# Altium PCB layout.PcbDoc (part 1 of 2)
Units mm, origin at the board's own origin, x right, y up, seen from the top; angles counter-clockwise.
Board outline 69.9 x 70 mm, 4 copper layers (Top Layer, InternalPlane1, InternalPlane2, Bottom Layer), stack 1.963 mm thick; 138 components, 103 nets, 461 pads, 387 vias.
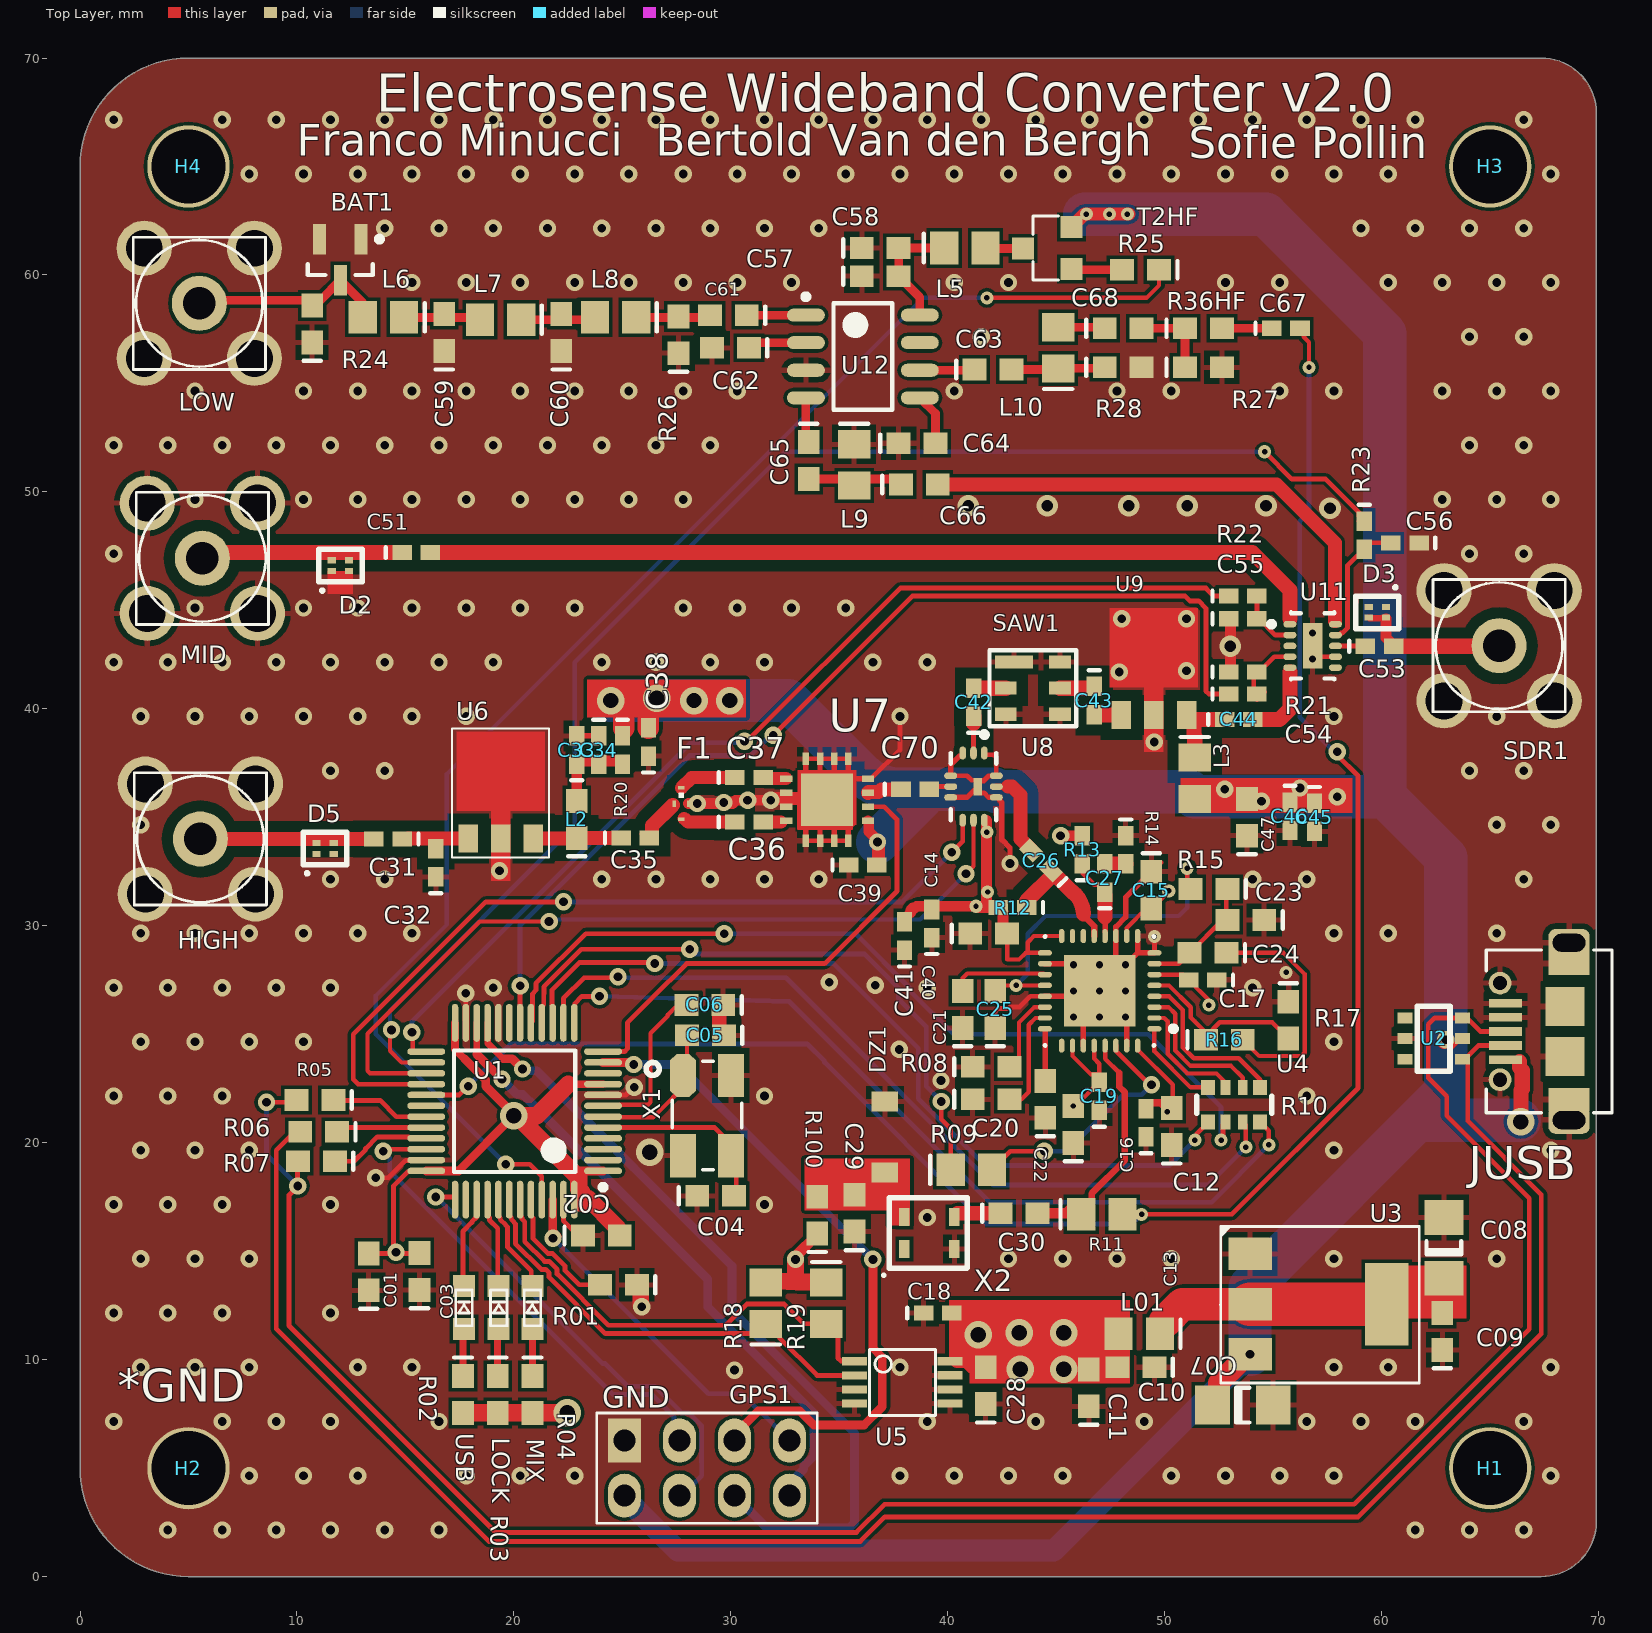
[diagram p0: Top Layer view]
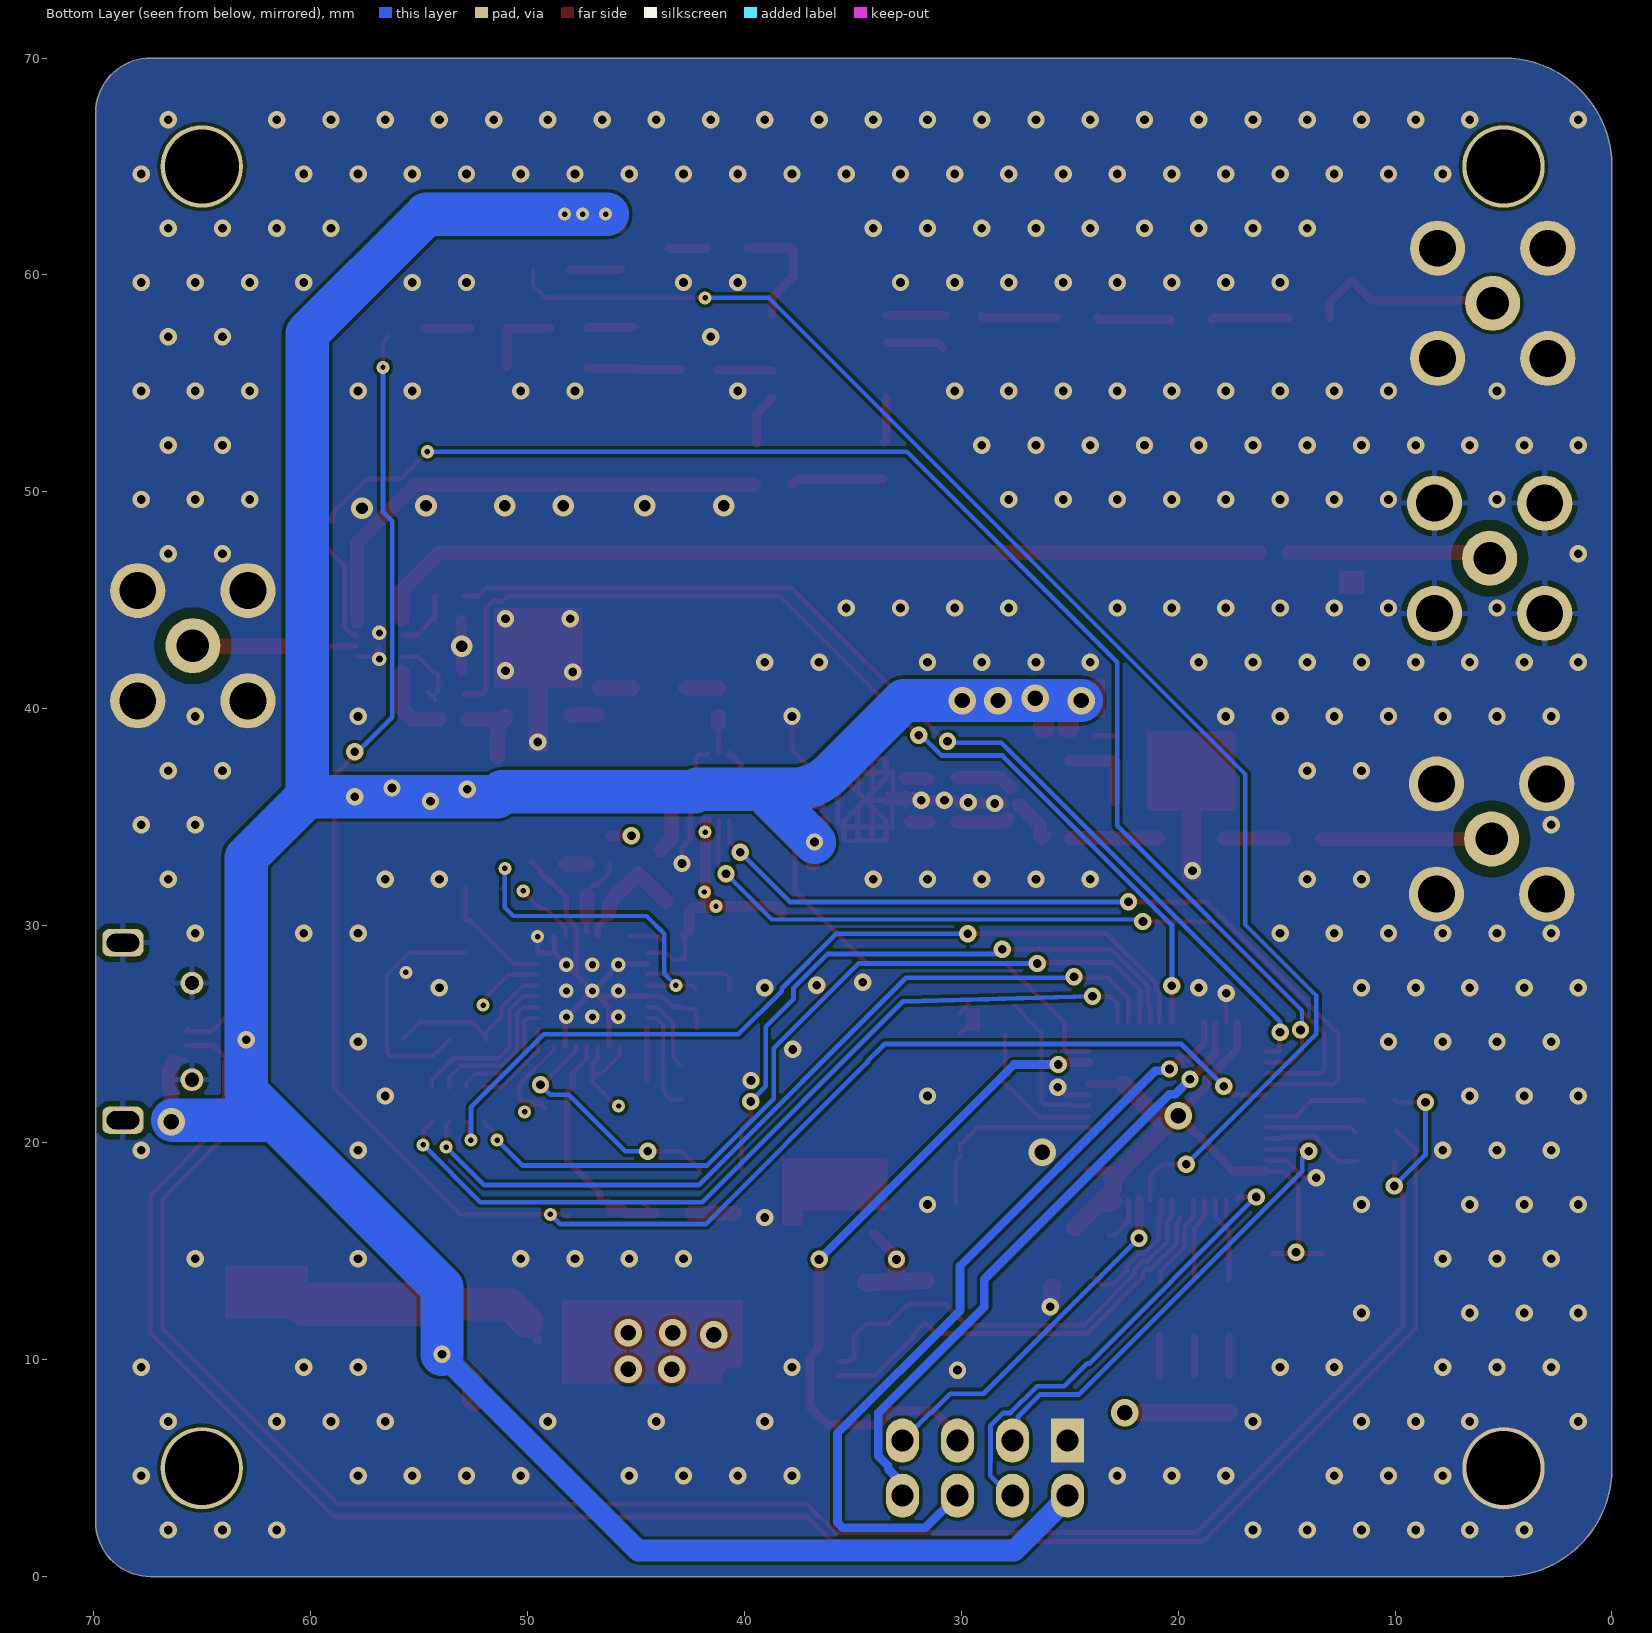
[diagram p1: Bottom Layer view, seen from below]
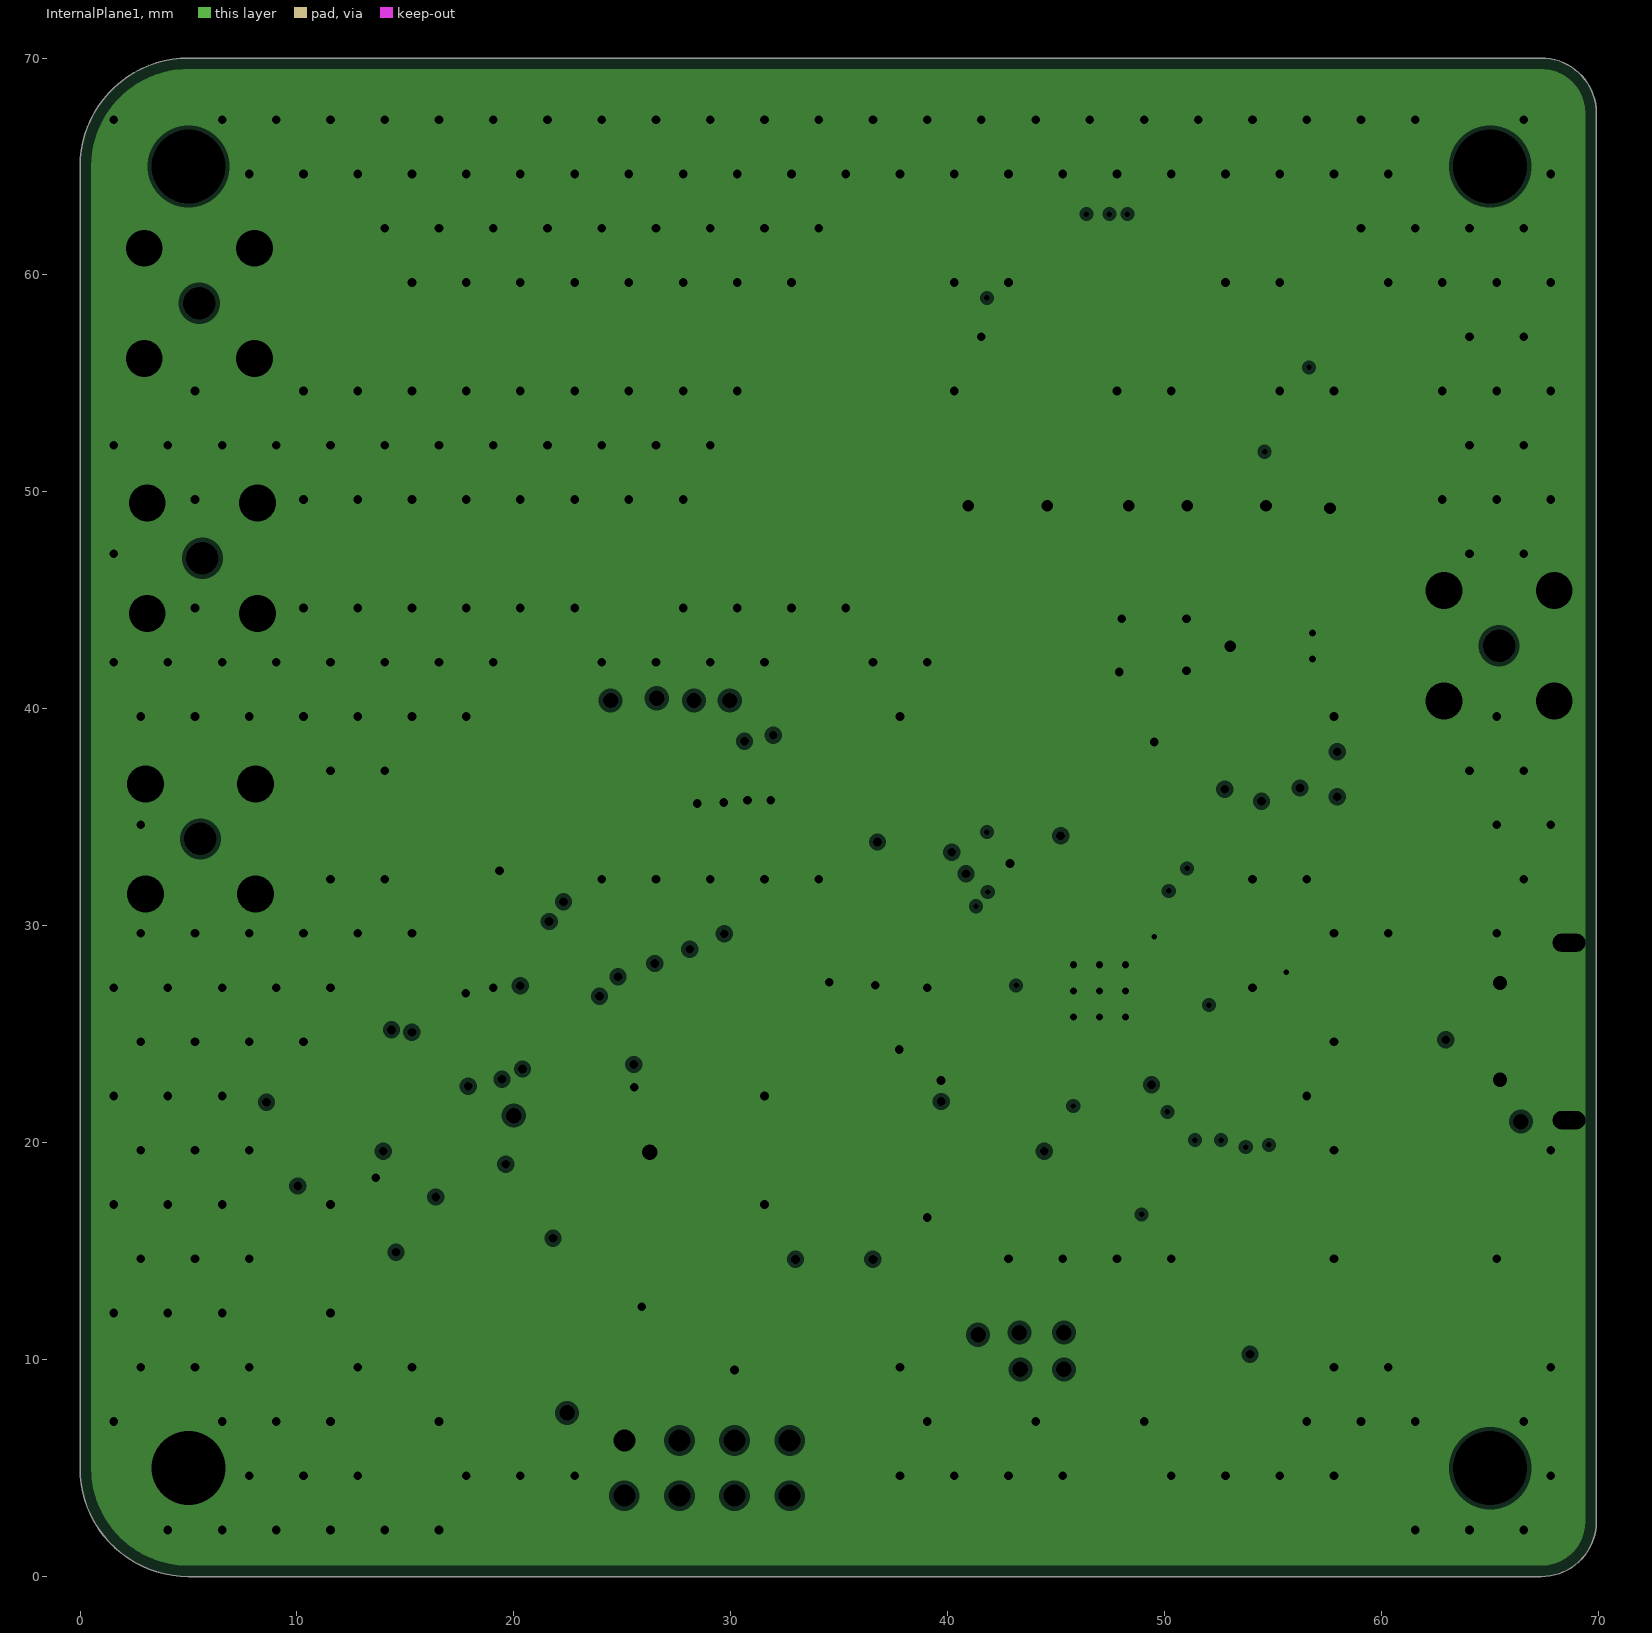
[diagram p2: InternalPlane1, clearances drawn from the general rule]
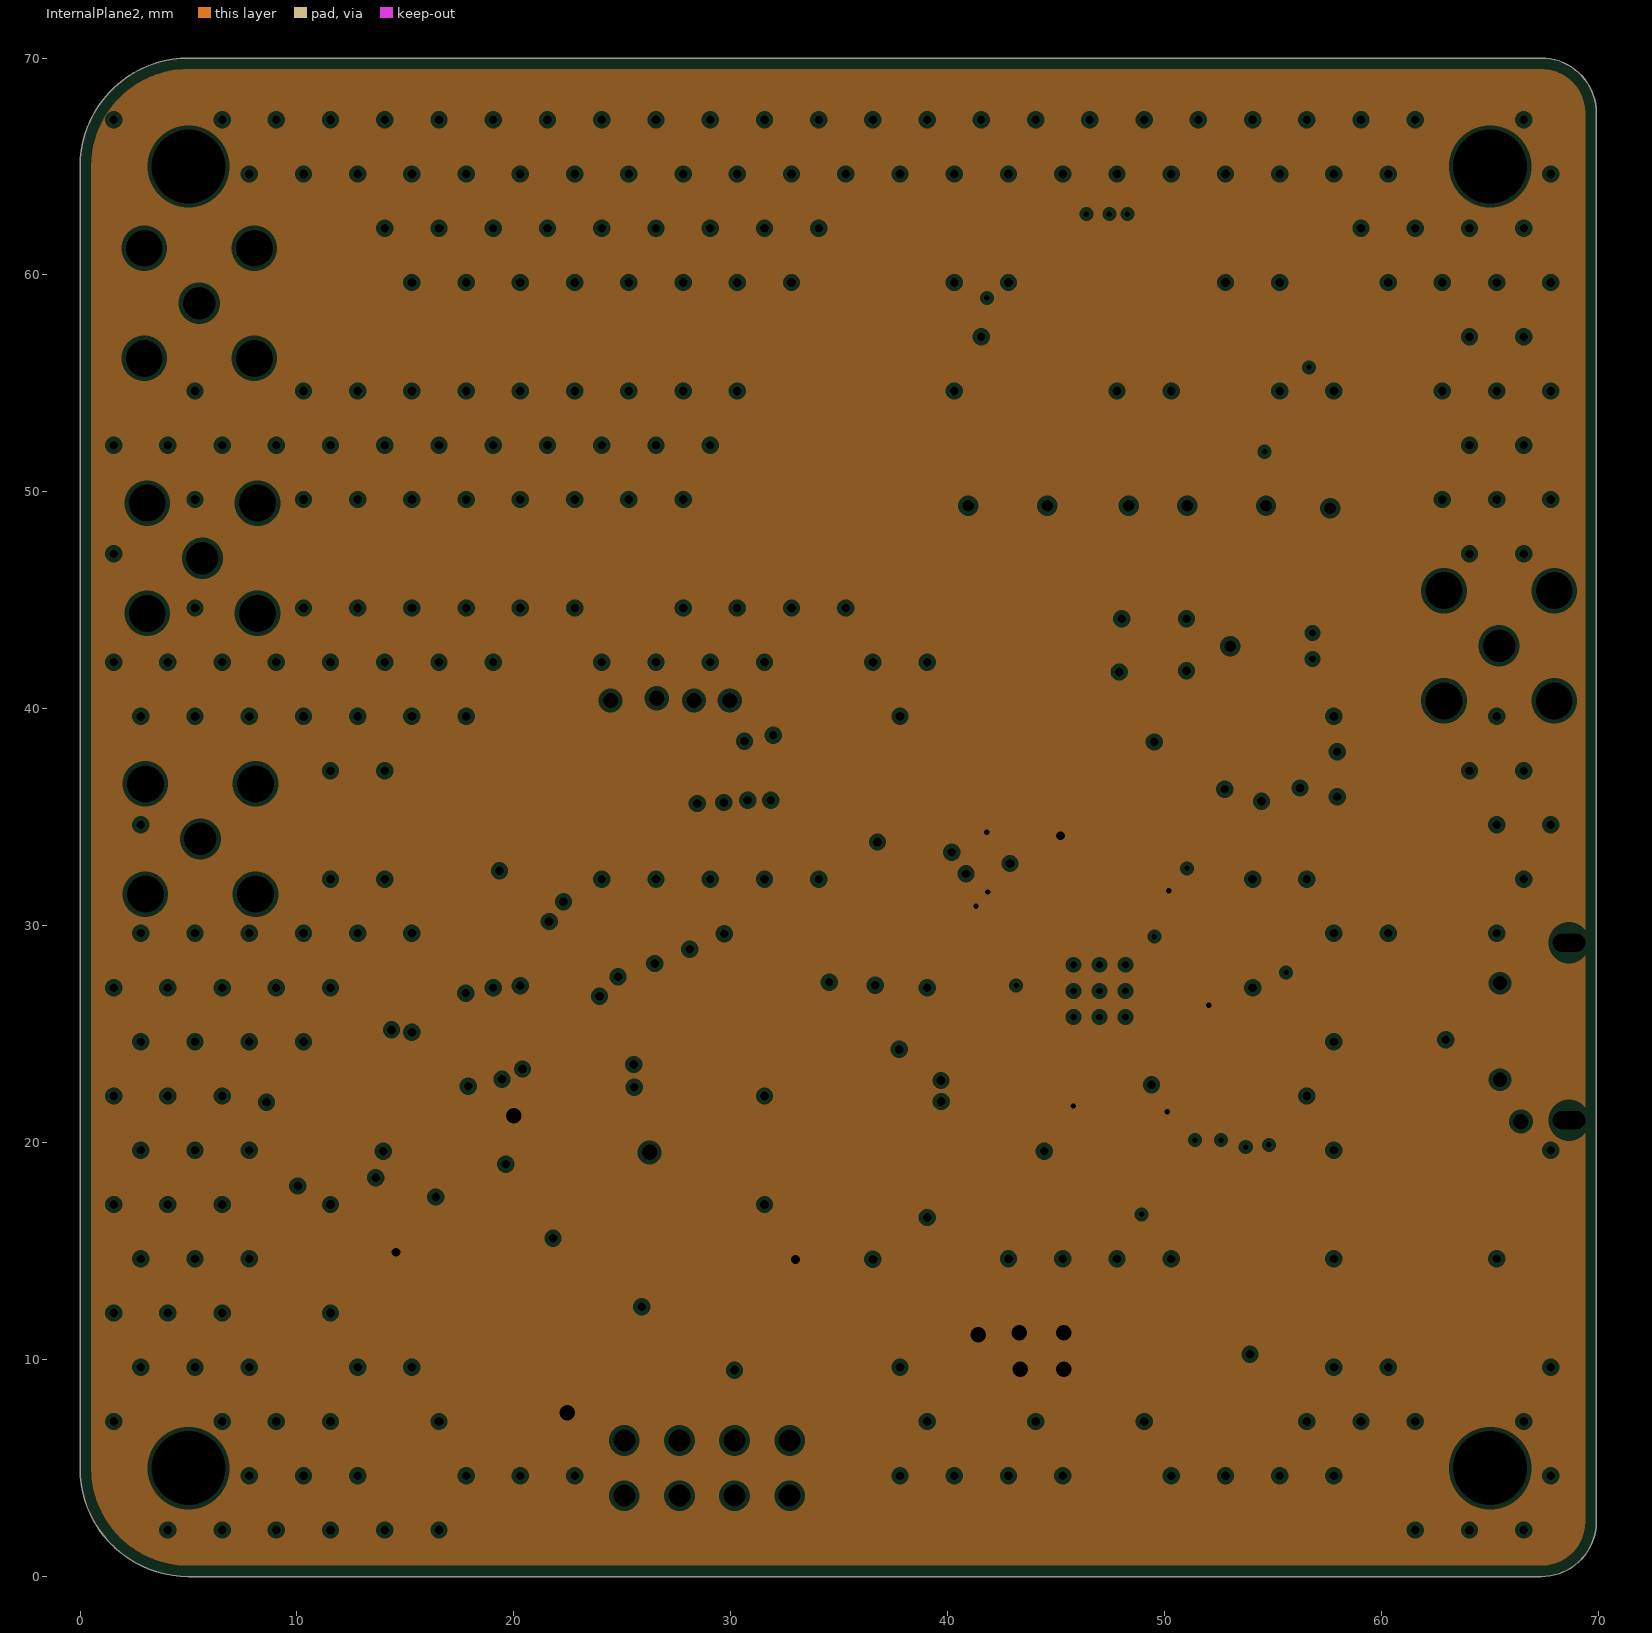
[diagram p3: InternalPlane2, clearances drawn from the general rule]

## Layer stack, top to bottom
Top Solder: solder mask 0.0102, Solder Resist, Dk 3.5
Top Layer: signal copper 0.0356
Dielectric1: core 0.36, FR-4, Dk 4.8
InternalPlane1: plane copper 0.036, net GND
Dielectric5: prepreg 1.1, FR-4, Dk 4.8
InternalPlane2: plane copper 0.036, net 3V3
Dielectric6: core 0.36, FR-4, Dk 4.8
Bottom Layer: signal copper 0.0356
Bottom Solder: solder mask 0.0102, Solder Resist, Dk 3.5

## Board outline
65.15,70 67.36,70 cw(c67.36,67.46) 69.9,67.46 69.9,2.54 cw(c67.36,2.54) 67.36,0 5,0 cw(c5,5) 0,5 0,65 cw(c5,65) 5,70

## Design rules (kind name [scope] priority, off if disabled: settings)
Clearance Clearance_1 [(InPolygon) vs InNetClass('RF')] p1: gap=0.5 ignorepadtopadclearanceinfootprint=FALSE except(0: Arc-Hole Track-Hole SMDPad-Hole THPad-Hole Via-Hole Fill-Hole Poly-Hole Region-Hole Text-Hole)
Clearance [All] p2: gap=0.15 ignorepadtopadclearanceinfootprint=FALSE except(0: Arc-Hole Track-Hole SMDPad-Hole THPad-Hole Via-Hole Fill-Hole Poly-Hole Region-Hole Text-Hole)
DiffPairsRouting [(InDifferentialPairClass('All Differential Pairs'))] p1: maxlimit=0.254 minlimit=0.254 mostfreqgap=0.254 substack1={63094944-3E1E-4474-AD37-56A4AEF7B2FF} toplayer_{63094944-3e1e-4474-ad37-56a4aef7b2ff}_minwidth=0.381 toplayer_{63094944-3e1e-4474-ad37-56a4aef7b2ff}_maxwidth=0.381 toplayer_{63094944-3e1e-4474-ad37-56a4aef7b2ff}_prefwidth=0.381 bottomlayer_{63094944-3e1e-4474-ad37-56a4aef7b2ff}_minwidth=0.381 bottomlayer_{63094944-3e1e-4474-ad37-56a4aef7b2ff}_maxwidth=0.381 bottomlayer_{63094944-3e1e-4474-ad37-56a4aef7b2ff}_prefwidth=0.381 toplayer_minwidth=0.381 toplayer_maxwidth=0.381 toplayer_prefwidth=0.381 bottomlayer_minwidth=0.381 bottomlayer_maxwidth=0.381 bottomlayer_prefwidth=0.381 maxuncoupledlength=12.7
HoleSize [All] p1: absolutevalues=TRUE maxlimit=3.5 minlimit=0.025 maxpercent=80.000 minpercent=20.000
MinimumAnnularRing [All] p1: minimumring=0.125
MinimumSolderMaskSliver [All] p1: minsoldermaskwidth=0
PlaneClearance [All] p1: clearance=0.2
PlaneConnect [All] p1: planeconnectstyle=Direct reliefexpansion=0.508 reliefentries=4 reliefconductorwidth=0.254 reliefairgap=0.254
PolygonConnect PolygonConnect_1 [(InPadClass('Direct') or isVia) vs InNet('GND')] p1: connectstyle=Direct reliefconductorwidth=0.254 reliefentries=4 polygonreliefangle="90 Angle" airgapwidth=0.254
PolygonConnect [All] p2: connectstyle=Relief reliefconductorwidth=0.254 reliefentries=4 polygonreliefangle="90 Angle" airgapwidth=0.254
RoutingVias [All] p1: holewidth=0.4 width=0.8 viastyle="Through Hole" minholewidth=0.25 minwidth=0.6 maxholewidth=2 maxwidth=2.5
SilkToSilkClearance [All] p1 off: silktosilkclearance=0.254
SilkToSolderMaskClearance SilkscreenOverComponentPads [IsPad] p1 off: minsilkscreentomaskgap=0.254 clearancetoexposedcopper=TRUE
SolderMaskExpansion [All] p1: expansion=0 istentingtop=FALSE
Width [All] p1: maxlimit=2.54 minlimit=0.15 preferedwidth=0.22 substack1={63094944-3E1E-4474-AD37-56A4AEF7B2FF}
23 further rules are at their usual default settings.

## Classes and differential pairs
component class Toplevel: H1 H2 H3 H4
net class RF: IMG_F_HIGH IMG_F_LOW LO+ LO- Mixer_switch_in NetC31_1 NetC31_2 NetC35_1 NetC35_2 NetC42_1 NetC42_2 NetC43_1 NetC43_2 NetC44_1 NetC51_1 NetC51_2 NetC53_1 NetC53_2 NetC70_1 NetC70_2 RFOUTA+ RFOUTA-
component class U_CPU: C01 C02 C03 C04 C05 C06 C07 C08 C09 C10 C11 C11CPU GPS1 JUSB L01 LOCK MIX R01 R02 R02CPU R03 R03CPU R04 R04CPU R05 R06 R07 R07CPU R08CPU U1 U2 U3 USB X1
component class U_LO: C7 C12 C13 C14 C15 C16 C17 C18 C018LO C19 C019LO C20 C020LO C21 C22 C23 C24 C25 C26 C27 C28 C29 C30 DZ1 R1 R2 R3 R4 R5 R6 R08 R9 R09 R10 R11 R011LO R12 R13 R14 R15 R16 R17 R18 R19 R039LO R040LO R041LO R100 U4 U5 X2
component class U_MixerHF: BAT1 C57 C58 C59 C60 C61 C62 C63 C64 C65 C66 C67 C68 C73HF C75HF C76HF C78HF C79HF C80HF C81HF C82HF C83HF C84HF L5 L6 L6HF L7 L7HF L8 L8HF L9 L9HF L10 L10HF LOW R24 R25 R26 R27 R28 R36HF T2HF U12
component class U_Mixer: C31 C32 C33 C34 C35 C36 C37 C38 C39 C40 C41 C42 C43 C44 C45 C46 C47 C51 C53 C54 C55 C56 C70 C71 C72 C102 C103 D2 D3 D5 F1 HIGH L2 L3 MID R20 R21 R22 R23 R30 R32 SAW1 SDR1 U6 U7 U8 U9 U11
pad class Direct: BAT1-1 BAT1-2 BAT1-3 C51-1 C51-2 C56-1 C56-2 C59-1 C59-2 C60-1 C60-2 C67-1 C67-2 C70-1 C70-2 C71-1 C71-2 C72-1 C72-2 D2-1 D2-2 D2-3 D2-4 D5-1 D5-2 D5-3 D5-4 GPS1-1 GPS1-2 GPS1-3 GPS1-4 GPS1-5 GPS1-6 GPS1-7 GPS1-8 H1-0 H2-0 H3-0 H4-0 HIGH-1 HIGH-2 HIGH-3 HIGH-4 HIGH-5 LOCK-1 LOCK-2 LOW-1 LOW-2 LOW-3 LOW-4 LOW-5 MIX-1 MIX-2 R28-1 R28-2 R30-1 R30-2 R32-1 R32-2 SDR1-1 SDR1-2 SDR1-3 SDR1-4 SDR1-5 U1-1 U1-2 U1-3 U1-4 U1-5 U1-6 U1-7 U1-8 U1-9 U1-10 U1-11 U1-12 U1-13 U1-14 U1-15 U1-16 U1-17 U1-18 U1-19 U1-20 U1-21 U1-22 U1-23 U1-24 U1-25 U1-26 U1-27 U1-28 U1-29 U1-30 U1-31 U1-32 U1-33 U11-1 U11-2 U11-3 U20-1 U20-2 U20-3 USB-1 USB-2

## Components (designator, comment, footprint, x,y, rotation, side; value= is the part's Value field where it differs from the comment)
BAT1 "BAT1704WH6327XTSA1" SOT95P230X110-3N 12,60.7 r270 top
C01 "100nF" "smd C0603_0.80" 13.307,14.048 r90 top
C02 "100nF" "smd C0603_0.80" 24.033,15.72 r0 top
C03 "100nF" "smd C0603_0.80" 15.647,14.063 r90 top
C04 "10pF" "smd C0603_0.80" 29.3,17.55 r0 top
C05 "10pF" "smd C0603_0.80" 28.83,24.95 r180 top
C06 "100nF" "smd C0603_0.80" 28.8,26.35 r180 top
C07 "10uF" "smd C1206 polar" 53.6,7.9 r0 top
C08 "10uF" "smd C1206 polar" 62.87,15.157 r90 top
C09 "100nF" "smd C0603_0.80" 62.8,11.3 r90 top
C10 "100nF" "smd C0603_0.80" 48.673,9.65 r180 top
C11 "10nF" "smd C0603_0.80" 46.5,8.7 r90 top
C12 "100nF" "smd C0603_0.80" 50.321,20.742 r90 top
C13 "100nF" "smd C0603_0.80" 45.786,20.842 r90 top
C14 "100nF" "smd C0603_0.80" 41.886,29.642 r0 top
C15 "100nF" "smd C0603_0.80" 49.386,31.642 r270 top
C16 "10nF" "smd C0402" 49.142,20.916 r90 top
C17 "10nF" "smd C0402" 51.75,27.5 r180 top
C18 "10nF" "smd C0402" 39.536,12.15 r0 top
C19 "10nF" "smd C0402" 46.986,22.142 r90 top
C20 "1uF" "smd C0603_0.80" 42,22 r0 top
C21 "1uF" "smd C0603_0.80" 40.686,26.142 r90 top
C22 "1uF" "smd C0603_0.80" 44.5,22 r90 top
C23 "12nF" "smd C0603_0.80" 53.736,30.264 r180 top
C24 "100nF" "smd C0603_0.80" 52,28.75 r180 top
C25 "820pF" "smd C0603_0.80" 42.186,26.142 r90 top
C26 "22pF" "smd C0402" 44.3,33.007 r135 top
C27 "22pF" "smd C0402" 47.236,32.2 r90 top
C28 "100nF" "smd C0603_0.80" 41.75,8.8 r90 top
C29 "100nF" "smd C0603_0.80" 35.7,16.75 r90 top
C30 "100nF" "smd C0603_0.80" 43.286,16.75 r0 top
C31 "22pF" "smd C0402" 14.2,34 r180 top
C32 "" "smd C0402" 16.4,32.9 r90 top
C33 "CSMD402/1nF" "smd C0402" 22.9,38.1 r90 top
C34 "100nF" "smd C0402" 23.909,38.1 r270 top
C35 "22pF" "smd C0402" 25.6,34.05 r0 top
C36 "22pF" "smd C0402" 30.836,34.783 r0 top
C37 "22pF" "smd C0402" 30.836,36.828 r0 top
C38 "100nF" "smd C0402" 26.2,38.468 r90 top
C39 "47pF" "smd C0402" 36.086,32.802 r0 top
C40 "10nF" "smd C0402" 39.263,30.1 r90 top
C41 "100nF" "smd C0402" 38,29.525 r90 top
C42 "100pF" "smd C0402" 41.2,40.3 r90 top
C43 "CSMD402/100nF" "smd C0402" 46.752,40.383 r270 top
C44 "CSMD402/100nF" "smd C0402" 53.408,39.514 r0 top
C45 "CSMD402/100pF" "smd C0402" 56.9,35 r270 top
C46 "CSMD402/1.5nF" "smd C0402" 55.769,35.05 r270 top
C47 "1uF" "smd C0603_0.80" 53.789,35 r90 top
C51 "CSMD402/100nF" "smd C0402" 15.5,47.2 r0 top
C53 "100pF" "smd C0402" 59.9,42.885 r0 top
C54 "47pF" "smd C0402" 53.6,41.7 r0 top
C55 "47pF" "smd C0402" 53.6,44.15 r0 top
C56 "47pF" "smd C0402" 61.075,47.65 r180 top
C57 "10nF" "smd C0603_0.80" 36.886,59.942 r0 top
C58 "100nF" "smd C0603_0.80" 36.886,61.242 r0 top
C59 "47pF" "smd C0603_0.80" 16.786,57.342 r90 top
C60 "47pF" "smd C0603_0.80" 22.186,57.342 r90 top
C61 "10nF" "smd C0603_0.80" 29.886,58.142 r180 top
C62 "10nF" "smd C0603_0.80" 29.986,56.642 r180 top
C63 "10nF" "smd C0603_0.80" 42.086,55.642 r0 top
C64 "47pF" "smd C0603_0.80" 38.586,52.242 r0 top
C65 "47pF" "smd C0603_0.80" 33.586,51.442 r270 top
C66 "" "smd C0603_0.80" 38.686,50.342 r0 top
C67 "47pF" "smd C0402" 55.586,57.542 r0 top
C68 "" "smd C0603_0.80" 48.086,57.542 r0 top
C70 "100pF" "smd C0402" 38.494,36.29 r0 top
D2 "ESD0P8RFL" ESD0P8RFL 12,46.6 r270 top
D3 "ESD0P8RFL" ESD0P8RFL 59.8,44.45 r90 top
D5 "ESD0P8RFL" ESD0P8RFL 11.3,33.558 r270 top
DZ1 "" SOD-123 37.1,20.264 r90 top
F1 "DPX165850DT-8017A1" DPX165850DT-8017A1 27.322,36.433 r270 top
GPS1 "DNP" "hdr 2x4" 28.9,5 r0 top
H1 "MOUNTHOLE_3MM" MOUNT_3MM#1 90.5,5 r0 top
H2 "MOUNTHOLE_3MM" MOUNT_3MM#2 5,5 r0 top
H3 "MOUNTHOLE_3MM" MOUNT_3MM#1 90.5,65 r0 top
H4 "MOUNTHOLE_3MM" MOUNT_3MM#3 7.6,67.1 r0 top
HIGH "CONSMA" "con SMA (recht)"#1 5.55,34 r0 top
JUSB "CON SMD USB Micro MOLEX" "SMD USB MOLEX" 69.908,25.128 r180 top
L01 "Ferrite" "smd C0805" 48.827,11.2 r180 top
L2 "SPL603/51nH" "smd C0603" 22.9,34.9 r90 top
L3 "SPL805/470nH" "smd C0805" 51.382,36.8 r270 top
L5 "Ferrite" "smd C0805" 40.786,61.242 r0 top
L6 "470nH" "smd C0805" 13.986,58.042 r180 top
L7 "470nH" "smd C0805" 19.386,57.942 r180 top
L8 "470nH" "smd C0805" 24.686,58.042 r180 top
L9 "470nH" "smd C0805" 35.686,51.242 r270 top
L10 "470nH" "smd C0805" 45.086,56.642 r90 top
LOCK "HSMG-C190" "led HSMH-C190 (Avago Technologies)" 19.3,12.4 r90 top
LOW "CONSMA" "con SMA (recht)"#2 5.5,58.692 r0 top
MID "CONSMA" "con SMA (recht)"#2 5.64,46.94 r0 top
MIX "HSMY-C190" "led HSMH-C190 (Avago Technologies)" 20.854,12.4 r90 top
R01 "1K5" "smd C0603_0.45" 24.817,13.45 r180 top
R02 "750" "smd C0603_0.45" 17.654,8.396 r270 top
R03 "750" "smd C0603_0.45" 19.254,8.396 r270 top
R04 "750" "smd C0603_0.45" 20.854,8.396 r270 top
R05 "1K5" "smd C0603_0.45" 10.83,21.966 r180 top
R06 "51" "smd C0603_0.45" 11.001,20.5 r180 top
R07 "51" "smd C0603_0.45" 10.9,19.15 r180 top
R08 "5K1" "smd C0603_0.45" 42,23.5 r0 top
R09 "270" "smd C0805_0.50" 41.086,18.75 r0 top
R10 "" "smd R EXB38v" 53.2,21.75 r0 top
R11 "DNP" "smd C0805_0.50" 47.1,16.7 r0 top
R12 "50R/402" "smd C0402_0.35" 42.986,30.842 r180 top
R13 "50R/402" "smd C0402_0.35" 46.2,33.5 r90 top
R14 "50R/402" "smd C0402_0.35" 48.2,33.5 r270 top
R15 "240" "smd C0603_0.45" 52.036,31.692 r180 top
R16 "" "smd C0603_0.45" 52.75,24.75 r0 top
R17 "91" "smd C0603_0.45" 55.7,25.65 r270 top
R18 "" "smd C0805_0.50" 31.6,12.6 r90 top
R19 "" "smd C0805_0.50" 34.4,12.6 r270 top
R20 "20R/402" "smd C0402_0.35" 25,38.1 r270 top
R21 "51" "smd C0402_0.35" 53.6,40.688 r0 top
R22 "51" "smd C0402_0.35" 53.6,45.2 r0 top
R23 "51" "smd C0402_0.35" 59.2,48 r270 top
R24 "10K" "smd C0603_0.45" 10.7,57.742 r90 top
R25 "10K" "smd C0603_0.45" 48.886,60.242 r180 top
R26 "51" "smd C0603_0.45" 27.586,57.242 r90 top
R27 "51" "smd C0603_0.45" 51.786,55.742 r0 top
R28 "51" "smd C0603_0.45" 48.086,55.742 r0 top
R36HF "390" "smd C0603_0.45" 51.786,57.542 r0 top
R100 "240" "smd C0603_0.45" 33.98,16.659 r90 top
SAW1 "BR39162B3522U410" SAW_package 43.926,40.95 r90 top
SDR1 "CONSMA" "con SMA (recht)"#3 65.415,42.91 r0 top
T2HF "BC856" "smd SOT-23" 44.586,61.242 r90 top
U1 "STM32F103C8T6" TSQFP50P900X900X160-48N 20.036,21.45 r180 top
U2 "IP4220CZ6" "smd SOT-457" 62.4,24.8 r270 top
U3 "LD1117-SOT223" SOT223 56.65,12.56 r270 top
U4 "MAX2870" MAXIM-T3255 47,27 r180 top
U5 "MCP9804" "smd MSOP/8" 37.9,8.95 r270 top
U6 "SBB3089Z" LFCSP 19.4,36.45 r0 top
U7 "SKY13286-359LF" QFN-16_skyworks 34.436,35.808 r180 top
U8 "LTC5549" LTC5549 41.186,36.415 r270 top
U9 "ADL5602" LFCSP 49.505,42.139 r0 top
U11 "SKY13322-375LF" QFN50P200X300X80-10N 56.819,42.9 r0 top
U12 "SA612" SOIC127P600X175-8N 36.086,56.242 r0 top
USB "HSMH-C190" "led HSMH-C190 (Avago Technologies)" 17.7,12.4 r90 top
X1 "KTL/5x3.2mm16MHz" "smd KTL 5x3.2" 27.8,23.1 r270 top
X2 "7L-38.400MDG-T" "TCXO 2.5x2x0.8mm" 39.144,15.837 r0 top

## Footprints (in the part's own frame and the unit in brackets; to place one, negate y for a bottom-side part, rotate by r counter-clockwise, add the part's x,y. Pads: shape width x height; smd on the part's side, far side on the other; paste and mask are expansions set on the pad)
"con SMA (recht)"#1 [mil]
  round 100 / inner round 60 / far side round 100 hole 59 paste+0 mask+0: 1(0,0)
  round 100 / inner round 60 / far side round 100 hole 67 paste+0 mask+0: 2(-100,100) 3(-100,-100)
  round 100 / inner round 0 / far side round 100 hole 67 paste+0 mask+0: 4(100,-100) 5(100,100)
  silkscreen extent -120,-120 120,120
"con SMA (recht)"#2 [mil]
  round 100 / inner round 60 / far side round 100 hole 59 paste+0 mask+0: 1(0,0)
  round 100 / inner round 60 / far side round 100 hole 67 paste+0 mask+0: 2(-100,100) 3(-100,-100) 4(100,-100) 5(100,100)
  silkscreen extent -120,-120 120,120
"con SMA (recht)"#3 [mil]
  round 100 / inner round 0 / far side round 100 hole 59 paste+0 mask+0: 1(0,0)
  round 100 / inner round 0 / far side round 100 hole 67 paste+0 mask+0: 2(-100,100) 3(-100,-100) 4(100,-100) 5(100,100)
  silkscreen extent -120,-120 120,120
DPX165850DT-8017A1 [mm] "Multilayer Diplexer"
  rect 0.15x0.3 smd: 1(0.075,0.4) 3(1.525,0.4)
  rect 0.3x0.15 smd: 2(0.8,0.075) 4(0.8,0.725)
  silkscreen extent 0.3,0.28 0.55,0.53
ESD0P8RFL [mm]
  rect 0.28x0.38 smd: 1(0.25,-0.4) 2(0.25,0.4) 3(-0.25,0.4) 4(-0.25,-0.4)
  silkscreen extent -0.76,-1 1.17,1
"hdr 2x4" [mil]
  rect 60x80 / inner round 0 / far side rect 60x80 hole 40 paste+0 mask+0: 1(-150,50)
  oval 60x80 / inner round 0 / far side oval 60x80 hole 40 paste+0 mask+0: 2(-150,-50) 3(-50,50) 4(-50,-50) 5(50,50) 6(50,-50) 7(150,50) 8(150,-50)
  silkscreen extent -200,-100 200,100
"led HSMH-C190 (Avago Technologies)" [mil]
  rect 40x40 smd paste+0 mask+0: 1(-39,0) 2(39,0)
  silkscreen extent -33,-15 32,15
LFCSP [mm]
  rect 0.9x1.3 smd: 1(-1.5,-2.425) 2(0,-2.425) 3(1.5,-2.425)
  Top Layer region: -2.05,-1.15 2.025,-1.15 2.025,2.5 -2.05,2.5
  Top Layer region: -0.45,-2.175 0.45,-2.175 0.45,-1.075 -0.45,-1.075
  silkscreen extent -2.25,-3.3 2.22,2.65
LTC5549 [mm] "QFN, 12-Leads, Body 2,1x3,1mm (max), Pitch 0,50mm, IPC Medium Density"
  oval 0.6x0.3 smd: 1(-1.55,0.5) 2(-1.55,0) 3(-1.55,-0.5) 7(1.55,-0.5) 8(1.55,0) 9(1.55,0.5)
  oval 0.3x0.6 smd: 4(-0.5,-1.05) 5(0,-1.05) 6(0.5,-1.05) 10(0.5,1.05) 11(0,1.05) 12(-0.5,1.05)
  rect 0.8x0.4 smd: 13(0,0.2)
  silkscreen extent -2.52,-1.05 1.55,1.05, body extent -1.55,-1.05 1.55,1.05, height 0.8
MAXIM-T3255 [mm] "QFN, 32-Leads, Body 5,0x5,0mm (max), Pitch 0,50mm, IPC Medium Density"
  oval 0.65x0.25 smd: 1(-2.525,1.75) 2(-2.525,1.25) 3(-2.525,0.75) 4(-2.525,0.25) 5(-2.525,-0.25) 6(-2.525,-0.75) 7(-2.525,-1.25) 8(-2.525,-1.75) 17(2.525,-1.75) 18(2.525,-1.25) 19(2.525,-0.75) 20(2.525,-0.25) 21(2.525,0.25) 22(2.525,0.75) 23(2.525,1.25) 24(2.525,1.75)
  oval 0.25x0.65 smd: 9(-1.75,-2.525) 10(-1.25,-2.525) 11(-0.75,-2.525) 12(-0.25,-2.525) 13(0.25,-2.525) 14(0.75,-2.525) 15(1.25,-2.525) 16(1.75,-2.525) 25(1.75,2.525) 26(1.25,2.525) 27(0.75,2.525) 28(0.25,2.525) 29(-0.25,2.525) 30(-0.75,2.525) 31(-1.25,2.525) 32(-1.75,2.525)
  rect 3.3x3.3 smd: 33(0,0)
  silkscreen extent -3.53,-2.52 2.52,2.53, body extent -2.5,-2.5 2.5,2.5, height 1
MOUNT_3MM#1 [mm]
  round 3.8 hole 3.4 paste-100 mask-100: 0(-25.5,0)
MOUNT_3MM#2 [mm]
  round 3.8 hole 3.4 paste-100 mask-100: 0(0,0)
MOUNT_3MM#3 [mm]
  round 3.8 hole 3.4 paste-100 mask-100: 0(-2.6,-2.1)
QFN50P200X300X80-10N [mm] "QFN, 10-Leads, Body 3,0x2,0mm (max), Pitch 0,50mm, IPC Medium Density"
  oval 0.6x0.3 smd: 1(-1.05,1) 2(-1.05,0.5) 3(-1.05,0) 4(-1.05,-0.5) 5(-1.05,-1) 6(1.05,-1) 7(1.05,-0.5) 8(1.05,0) 9(1.05,0.5) 10(1.05,1)
  rect 0.9x2.1 smd: 11(0,0)
  silkscreen extent -2.02,-1.55 1,1.55, body extent -1,-1.5 1,1.5, height 0.8
QFN-16_skyworks [mm]
  rect 0.575x0.3 smd: 1(-1.887,0.975) 2(-1.887,0.324) 3(-1.887,-0.325) 4(-1.887,-0.975) 9(1.887,-0.975) 10(1.887,-0.325) 11(1.887,0.327) 12(1.889,0.975)
  rect 0.3x0.575 smd: 5(-0.975,-1.886) 6(-0.325,-1.888) 7(0.325,-1.888) 8(0.975,-1.888) 13(0.975,1.889) 14(0.325,1.889) 15(-0.326,1.887) 16(-0.975,1.888)
  rect 2.4x2.4 smd: 17(0,0)
  Top Layer region: -1.157,1.276 -1.146,1.276 -1.146,1.305 -1.157,1.305
  Top Layer region: -1.163,1.259 -1.142,1.259 -1.142,1.283 -1.163,1.283
  Top Layer region: -1.171,1.246 -1.133,1.246 -1.133,1.267 -1.171,1.267
  Top Layer region: -1.178,1.235 -1.13,1.235 -1.13,1.251 -1.178,1.251
  Top Layer region: -1.18,1.229 -1.131,1.229 -1.131,1.247 -1.18,1.247
  Top Layer region: -1.184,1.22 -1.131,1.22 -1.131,1.24 -1.184,1.24
  Top Layer region: -1.192,1.214 -1.127,1.214 -1.127,1.231 -1.192,1.231
  Top Layer region: -1.198,1.203 -1.119,1.203 -1.119,1.223 -1.198,1.223
  Top Layer region: -1.205,1.201 -1.124,1.201 -1.124,1.214 -1.205,1.214
  Top Layer region: -1.213,1.197 -1.149,1.197 -1.149,1.209 -1.213,1.209
  Top Layer region: -1.219,1.187 -1.187,1.187 -1.187,1.202 -1.219,1.202
  Top Layer region: -1.223,1.187 -1.193,1.187 -1.193,1.195 -1.223,1.195
  Top Layer region: -1.231,1.183 -1.19,1.183 -1.19,1.191 -1.231,1.191
  Top Layer region: -1.24,1.178 -1.185,1.178 -1.185,1.185 -1.24,1.185
  Top Layer region: -1.245,1.173 -1.181,1.173 -1.181,1.181 -1.245,1.181
  Top Layer region: -1.257,1.166 -1.175,1.166 -1.175,1.175 -1.257,1.175
  Top Layer region: -1.269,1.157 -1.182,1.157 -1.182,1.169 -1.269,1.169
  Top Layer region: -1.289,1.154 -1.188,1.154 -1.188,1.162 -1.289,1.162
  Top Layer region: -1.306,1.15 -1.19,1.15 -1.19,1.156 -1.306,1.156
  Top Layer region: -1.35,-1.225 -1.125,-1.225 -1.125,1.15 -1.35,1.15
  Top Layer region: -1.35,-1.35 1.175,-1.35 1.175,-1.125 -1.35,-1.125
  Top Layer region: 1.175,-1.35 1.35,-1.35 1.35,1.125 1.175,1.125
  Top Layer region: -1.15,1.125 1.35,1.125 1.35,1.35 -1.15,1.35
  Top Layer lines w0.01: 1.35,1.35 1.35,0.025 1.35,-1.35 0.975,-1.35 0.325,-1.35 -0.325,-1.35 -0.975,-1.35 -1.35,-1.35 -1.35,-0.975 -1.35,1.15 ccw(c-1.35,1.35) -1.15,1.35 -0.975,1.35 -0.326,1.35 0.325,1.35 0.975,1.35 1.35,1.35
SAW_package [mm]
  rect 0.6x1.75 smd: 1(1.2,0.875)
  rect 0.6x1 smd: 2(0,1.25) 2(0,1.25) 3(-1.2,1.25) 4(-1.2,-1.25) 5(0,-1.25) 6(1.2,-1.25)
  silkscreen extent -1.75,-2 1.75,2
"smd C0402" [mm] "Chip Capacitor; Body 1.0 x 0.5 mm (LxW typ)"
  rect 0.9x0.7 smd: 1(-0.65,0) 2(0.65,0)
  silkscreen extent -1.4,-0.25 -1.4,0.25
"smd C0402_0.35" [mm] "Chip Capacitor; Body 1.0 x 0.5 mm (LxW typ)"
  rect 0.9x0.7 smd: 1(-0.65,0) 2(0.65,0)
  silkscreen extent -1.4,-0.25 -1.4,0.25
"smd C0603" [mm] "Chip Capacitor; Body 1.6 x 0.8 mm (LxW typ)"
  rect 1.1x1 smd: 1(-0.85,0) 2(0.85,0)
  silkscreen extent -1.7,-0.4 -1.7,0.4
"smd C0603_0.45" [mm] "Chip Capacitor; Body 1.6 x 0.8 mm (LxW typ)"
  rect 1.1x1 smd: 1(-0.85,0) 2(0.85,0)
  silkscreen extent -1.7,-0.4 -1.7,0.4
"smd C0603_0.80" [mm] "Chip Capacitor; Body 1.6 x 0.8 mm (LxW typ)"
  rect 1.1x1 smd: 1(-0.85,0) 2(0.85,0)
  silkscreen extent -1.7,-0.4 -1.7,0.4
"smd C0805" [mm] "Chip Capacitor; Body 2.0 x 1.2 mm (LxW typ)"
  rect 1.3x1.5 smd: 1(-0.95,0) 2(0.95,0)
  silkscreen extent -1.9,-0.65 -1.9,0.65
"smd C0805_0.50" [mm] "Chip Capacitor; Body 2.0 x 1.2 mm (LxW typ)"
  rect 1.3x1.5 smd: 1(-0.95,0) 2(0.95,0)
  silkscreen extent -1.9,-0.65 -1.9,0.65
"smd C1206 polar" [mm] "Chip Capacitor; Body 3.2 x 1.6 mm (LxW typ)"
  round 0.5 on Top Overlay: 0(-1.5,-1.5)
  rect 1.6x1.8 smd: 1(-1.4,0) 2(1.4,0)
  silkscreen extent -0.3,-0.8 0.3,0.8
"smd KTL 5x3.2" [mm] "smd Kristal 5x3.2mm"
  oct 2x1.2 smd: 1(0,0)
  rect 2x1.2 smd: 2(3.7,0) 3(3.7,2.2) 4(0,2.2)
  silkscreen extent -0.65,-1.7 4.35,2.7
"smd MSOP/8" [mil]
  rect 15x45 smd: 1(-38.39,-86.61) 2(-12.79,-86.61) 3(12.81,-86.61) 4(38.41,-86.61) 5(38.39,86.61) 6(12.79,86.61) 7(-12.81,86.61) 8(-38.41,86.61)
  silkscreen extent -60,-59 60,61
"smd R EXB38v" [mm] "Panasonic EXB38V resistor network 0603"
  rect 0.65x0.7 smd: 1(-1.2,-0.8) 2(-1.2,0.8) 7(1.2,-0.8) 8(1.2,0.8)
  rect 0.45x0.7 smd: 3(-0.4,-0.8) 4(-0.4,0.8) 5(0.4,-0.8) 6(0.4,0.8)
  silkscreen extent -1.73,-0.4 1.73,0.4
"smd SOT-23" [mil]
  rect 40x40 smd paste+0 mask+0: 1(-38,-44) 2(38,-44) 3(-1,44)
  silkscreen extent -58,-20 58,26
"smd SOT-457" [mm]
  rect 0.5x0.7 smd: 1(-0.95,-1.325) 2(0,-1.325) 3(0.95,-1.325) 4(0.95,1.325) 5(0,1.325) 6(-0.95,1.325)
  round 0.5 on Top Overlay: 7(-1,-0.25)
  silkscreen extent -1.5,-0.75 1.5,0.75
"SMD USB MOLEX" [mm] "47589-0001 Molex MICRO USB TYPE AB"
  rect 1.5x0.4 smd: 1(4.2,1.3) 2(4.2,0.65) 3(4.2,0) 4(4.2,-0.65) 5(4.2,-1.3)
  rrect50% 1.9x1.25 hole 0.83 slot 1.5 at 0 deg unplated: 6(1.27,4.09) 6(1.27,-4.09)
  rect 1.9x1.075 smd: 6(1.27,3.137) 6(1.27,-3.137)
  rect 1.8x1.8 smd: 6(1.45,1.15) 6(1.45,-1.15)
  round 1.05 hole 0.65 unplated: 6(4.45,-2.225) 6(4.45,2.225)
  silkscreen extent -0.71,-3.75 5.09,3.75
SOD-123 [mm]
  rect 0.91x1.22 smd: 1(-1.635,0) 2(1.635,0)
SOIC127P600X175-8N [mm] "SOIC, 8-Leads, Body 4,9x4,0mm (max), Pitch 1,27mm, IPC Medium Density"
  oval 1.75x0.6 smd: 1(-2.625,1.905) 2(-2.625,0.635) 3(-2.625,-0.635) 4(-2.625,-1.905) 5(2.625,-1.905) 6(2.625,-0.635) 7(2.625,0.635) 8(2.625,1.905)
  silkscreen extent -2.75,-2.45 1.35,2.88, body extent -1.97,-2.47 1.97,2.47, height 1.75
SOT95P230X110-3N [mm] "SOT23, 3-Leads, Body 3,0x2,5mm (max), Pitch 0,95mm, IPC Medium Density"
  rect 1.4x0.6 smd: 1(-0.95,0.95) 2(-0.95,-0.95) 3(0.95,0)
  silkscreen extent -1.07,-1.5 0.7,1.93, body extent -0.7,-1.5 0.7,1.5, height 1.1
SOT223 [mil]
  rect 59x79 smd: 1(-91,-107) 2(0,-107) 3(91,-107)
  rect 150x79 smd: 4(0,141)
  silkscreen extent -141,-161 143,200, body extent -131,-105 135,162, height 51
"TCXO 2.5x2x0.8mm" [mm]
  rect 0.5x0.825 smd: 1(-1.147,-0.737) 2(1.155,-0.737) 3(1.155,0.737) 4(-1.147,0.737)
  silkscreen extent -2.1,-1.95 1.75,1.63
TSQFP50P900X900X160-48N [mm] "TSQFP, 48-Leads, Body 9,2x9,2mm (max), Pitch 0,50mm, IPC Medium Density"
  oval 1.75x0.3 smd: 1(-4.075,2.75) 2(-4.075,2.25) 3(-4.075,1.75) 4(-4.075,1.25) 5(-4.075,0.75) 6(-4.075,0.25) 7(-4.075,-0.25) 8(-4.075,-0.75) 9(-4.075,-1.25) 10(-4.075,-1.75) 11(-4.075,-2.25) 12(-4.075,-2.75) 25(4.075,-2.75) 26(4.075,-2.25) 27(4.075,-1.75) 28(4.075,-1.25) 29(4.075,-0.75) 30(4.075,-0.25) 31(4.075,0.25) 32(4.075,0.75) 33(4.075,1.25) 34(4.075,1.75) 35(4.075,2.25) 36(4.075,2.75)
  oval 0.3x1.75 smd: 13(-2.75,-4.075) 14(-2.25,-4.075) 15(-1.75,-4.075) 16(-1.25,-4.075) 17(-0.75,-4.075) 18(-0.25,-4.075) 19(0.25,-4.075) 20(0.75,-4.075) 21(1.25,-4.075) 22(1.75,-4.075) 23(2.25,-4.075) 24(2.75,-4.075) 37(2.75,4.075) 38(2.25,4.075) 39(1.75,4.075) 40(1.25,4.075) 41(0.75,4.075) 42(0.25,4.075) 43(-0.25,4.075) 44(-0.75,4.075) 45(-1.25,4.075) 46(-1.75,4.075) 47(-2.25,4.075) 48(-2.75,4.075)
  silkscreen extent -4.2,-2.8 2.8,3.62, body extent -3.5,-3.5 3.5,3.5, height 1.6

## Part data
BAT1: library part NX3008NBK
C01 C02 C03 C06 C09 C10 C12 C13 C14 C15 C24 C28 C29 C30 C58: library part CSMD603/100nF, "smd capaciteit, verp.0603, 100nF", Component Type=Standard, Part Number=CSMD603/100nF, Pin Count=2, Supplier 1=Farnell
  C01 C02 C03 C06 C09 C10 C12 C13 C14 C15 C28 C29 C30 C58: Designator=CSMD603/100nF
C04 C05 C66 C68: library part CSMD603/10pF, "smd capaciteit, verp.0603, 10pF", Component Type=Standard, Part Number=CSMD603/10pF, Pin Count=2, Supplier 1=Farnell
  C04 C05 C66: Designator=CSMD603/10pF
C07 C08: library part CSMD1206/10uF/10V, "smd capaciteit, tantalium, verp.1206, 10uF/10V", Component Type=Standard, Designator=CSMD1206/10uF/10V, Part Number=CSMD1206/10uF/10V, Pin Count=2, Supplier 1=Farnell
C11 C57 C61 C62 C63: library part CSMD603/10nF, "smd capaciteit, verp.0603, 10nF", Component Type=Standard, Part Number=CSMD603/10nF, Pin Count=2, Supplier 1=Farnell
C16 C17 C18 C19: library part CSMD402/10nF, "smd capaciteit, verp.0402, 10nF", Component Type=Standard, Part Number=CSMD402/10nF, Pin Count=2, Supplier 1=Farnell
C20 C21 C22 C47: library part CSMD603/1uF, "smd capaciteit, verp.0603, 1uF", Part Number=CSMD603/18nF, Component Type=Standard, Designator=CSMD603/18nF, Pin Count=2
  C47: Supplier 1=Farnell
C23: library part CSMD603/12nF, "smd capaciteit, verp.0603, 12nF", Component Type=Standard, Designator=CSMD603/12nF, Part Number=CSMD603/12nF, Pin Count=2
C25: library part CSMD603/820pF, "smd capaciteit, verp.0603, 820pF", Component Type=Standard, Part Number=CSMD603/820pF, Pin Count=2, Supplier 1=Farnell
C26 C27 C31 C35 C36 C37: library part CSMD402/22pF, "smd capaciteit, verp.0402, 22pF", Component Type=Standard, Part Number=CSMD402/22pF, Pin Count=2, Supplier 1=Farnell
  C26 C27 C31 C35: Designator=CSMD402/22pF
C32: library part CSMD402/1pF, "smd capaciteit, verp.0402, 1pF", Part Number=CSMD402/100nF, Component Type=Standard, Pin Count=2, Supplier 1=Farnell
C33: "smd capaciteit, verp.0402, 1nF", Component Type=Standard, Designator=CSMD402/1nF, Part Number=CSMD402/1nF, Pin Count=2, Supplier 1=Farnell
C34 C38 C41: library part CSMD402/100nF, "smd capaciteit, verp.0402, 100nF", Component Type=Standard, Part Number=CSMD402/100nF, Pin Count=2, Supplier 1=Farnell
C39 C67: library part CSMD402/47pF, "smd capaciteit, verp.0402, 47pF", Component Type=Standard, Part Number=CSMD402/47pF, Pin Count=2, Supplier 1=Farnell
C40: library part CSMD402/100nF, "smd capaciteit, verp.0402, 10nF", Component Type=Standard, Designator=CSMD402/100nF, Part Number=CSMD402/100nF, Pin Count=2, Supplier 1=Farnell
C42 C53 C54 C55 C56 C70: library part CSMD402/100pF, "smd capaciteit, verp.0402, 100pF", Component Type=Standard, Part Number=CSMD402/100pF, Pin Count=2, Supplier 1=Farnell
C43 C44 C51: "smd capaciteit, verp.0402, 100nF", Component Type=Standard, Part Number=CSMD402/100nF, Pin Count=2, Supplier 1=Farnell
  C43 C44: Designator=CSMD402/100nF
C45: "smd capaciteit, verp.0402, 100pF", Component Type=Standard, Designator=CSMD402/100pF, Part Number=CSMD402/100pF, Pin Count=2, Supplier 1=Farnell
C46: "smd capaciteit, verp.0402, 1.5nF", Component Type=Standard, Designator=CSMD402/1.5nF, Part Number=CSMD402/1.5nF, Pin Count=2, Supplier 1=Farnell
C59 C60 C64 C65: library part CSMD603/47pF, "smd capaciteit, verp.0603, 47pF", Component Type=Standard, Part Number=CSMD603/47pF, Pin Count=2, Supplier 1=Farnell
DZ1: library part MMSZ4678T1G
GPS1: library part "CON HDR 2x4", "pcb header recht 2x4  pitch 100mil", Component Type=Standard, Designator="CON HDR 2x4", Part Number="CON HDR 2x4", Pin Count=8, Supplier 1=Farnell
HIGH LOW MID SDR1: library part "CON SMA", "SMA connector, rechtop", Component Type=Standard, Designator="CON SMA", Part Number="CON SMA", Pin Count=5, Supplier 1=Farnell
JUSB: "MOLEX - 47589-0001 - MICRO USB TYPE AB", Supplier 1=Farnell
L01 L5: library part "Ferrite 0805", "Ferrite bead, 0805 package", Supplier 1=Farnell
L3: "smd spoel, verpakking 805, 470nH", Supplier 1=Farnell
L6 L7 L8 L9 L10: library part SPL805/470nH, "smd spoel, verpakking 805, 470nH", Supplier 1=Farnell
LOCK: "led smd groen, Avago Techn., HSMG-C190", Supplier 1=Farnell
MIX: "led smd geel, Avago Techn., HSMY-C190", Supplier 1=Farnell
R01 R05: library part 1K5/603, "weerstand SMD603, 1K5", Supplier 1=Farnell
R02 R03 R04: library part 750R/603, "weerstand SMD603, 750R", Supplier 1=Farnell
R06 R07 R26 R27 R28: library part 51R/603, "weerstand SMD603, 51R", Supplier 1=Farnell
R08: library part 5K1/603, "weerstand SMD603, 5K1"
R09 R11: library part 270R/805, "weerstand SMD805, 270R"
R10: library part 22R/Network4/603, "weerstandsnetwerk SMD603, 4x 22R", Supplier 1=Farnell
R12 R13 R14: "weerstand SMD402, 50R", Supplier 1=Farnell
R15 R100: library part 240R/603, "weerstand SMD603, 240R", Supplier 1=Farnell
R16: library part 30R/603, "weerstand SMD603, 30R", Supplier 1=Farnell
R17: library part 91R/603, "weerstand SMD603, 91R", Supplier 1=Farnell
R18 R19: library part 1K8/805, "weerstand SMD805, 1K8"
R20: "weerstand SMD402, 20R", Supplier 1=Farnell
R21 R22 R23: library part 51R/402, "weerstand SMD402, 51R", Supplier 1=Farnell
R24 R25: library part 10K/603, "weerstand SMD603, 10K", Supplier 1=Farnell
R36HF: library part 390R/603, "weerstand SMD603, 390R", Supplier 1=Farnell
SAW1: "Saw Filter", Manufacturer=TDK, Manufacturer part number=B39162B3522U410
T2HF: "PNP transistor, smd", Supplier 1=Farnell
U1: library part STM32F100xx
U2: "Dual USB 2.0 integrated ESD protection", Supplier 1=Farnell
U5: "±0.25°C Typical Accuracy Digital Temperature Sensor", Supplier 1=Farnell
U6: "RF Amplifier", Manufacturer=rfmd/Qorvo, MPN=SBB3089ZSR
U7: "SPDT-J2/J1 to RFC", Manufacturer=Skyworks
U9: "Gain block", Manufacturer="Analog Devices", Manufacturer part number=ADL5602ARKZ-R7
USB: "led smd rood, Avago Techn., HSMH-C190", Supplier 1=Farnell
X1: library part "KTL/5x3.2mm 16MHz", "TXC Xtal 16.000 MHz, 5x3.2mm", Component Type=Standard, Designator="KTL/5x3.2mm 16MHz", Part Number="KTL/5x3.2mm 16MHz", Pin Count=4, Supplier 1=Farnell
L2: Supplier 1=Farnell

## Via types
v1: diameter 0.8, hole 0.4, Top Layer to Bottom Layer, 334 vias
v2: diameter 0.6, hole 0.25, Top Layer to Bottom Layer, 22 vias
v3: diameter 1.27, hole 0.711, Top Layer to Bottom Layer, 13 vias
v4: diameter 0.66, hole 0.33, Top Layer to Bottom Layer, tented top, 11 vias
v5: diameter 1, hole 0.54, Top Layer to Bottom Layer, 7 vias

## Nets (pads, with @x,y where several pads share a name; then routed paths per layer and width w, separated by ;. In a path a pad name is that pad's centre, name@x,y a point inside that pad or via, vN(x,y) a via of type N, cw(c..) or ccw(c..) an arc to the next point about the centre after c; other vN are vias at no path point)
1V8: C29.2 DZ1.1 R100.2 X2.4 | length 2.8
  Top Layer w0.22: C29.2@35.7,17.55 35.903,17.347 37.224,17.347 37.695,16.877 37.857,16.877 37.997,16.737 X2.4@37.997,16.574
3V3: C01.2 C02.2 C03.2 C10.2 C11.2 C12.2 C13.2 C14.2 C15.2 C16.2 C17.2 C18.2 C19.2 C28.2 C40.2 C41.2 L01.2 R02.2 R03.2 R04.2 R12.2 R13.2 R18.2 R19.1 R100.1 U1.1 U1.9 U1.24 U1.36 U1.48 U4.6 U4.10 U4.16 U4.17 U4.26 U4.28 U4.32 U5.8 U8.9 | length 81.3
  Top Layer w0.2: v2(41.3,30.9) v2@41.358,30.842 ; C14.2@42.736,29.642 42.736,28.442 43.286,28.442 43.594,28.75 ; U4.17@44.475,28.75 43.594,28.75 ; U4.16@45.25,29.525 43.969,29.525 43.686,29.242 43.686,28.842 43.594,28.75 ; U4.26@45.75,24.475 45.75,24 46.6,23.15 46.9,23.15 C19.2@46.986,23.064 ; v2(45.786,21.692) 45.886,21.692 C19.2@46.986,22.792 C19.2@46.986,23.064 ; U4.28@46.75,24.475 46.75,23.878 46.986,23.642 C19.2@46.986,23.064 ; U4.10@48.25,29.525 48.25,29.9 49.142,30.792 C15.2@49.386,30.792 49.4,30.792 50.2,31.592 v2(50.186,31.606) ; U4.32@48.75,24.475 48.75,24.289 48.789,24.25 48.798,24.25 50.378,22.669 50.378,22.042 50.252,21.916 49.392,21.916 49.339,21.863 C16.2@49.339,21.763 ; C16.2@49.142,21.566 C16.2@49.339,21.763 ; U4.6@49.525,27.75 50.85,27.75 C17.2@51.1,27.5 52.036,26.564 v2(52.036,26.342) ; C12.2@50.321,21.592 50.149,21.42 v2(50.121,21.42) 49.778,21.763 C16.2@49.339,21.763
  Top Layer w0.22: C01.2@13.307,14.898 C03.2@15.647,14.898 ; v1(14.564,14.955) 14.454,15.065 14.454,18.008 15.131,18.685 15.946,18.685 U1.36@15.961,18.7 ; v1(32.983,14.62) v1@32.983,14.762 ; R100.1@33.98,15.759 R100.1@33.98,15.809
  Top Layer w0.35: U1.24@17.286,25.525 17.286,24.305 17.736,23.855 ; 22.5,22.7 U1.9@24.111,22.7
  Top Layer w0.4: U1.36@15.961,18.7 17.444,18.7 v3(19.994,21.25) 19.994,21.314 18.7,22.608 18.7,22.891 17.736,23.855 ; 22.676,18.7 U1.1@24.111,18.7 ; 23.371,17 23.161,17 cw(c23.161,17.375) U1.48@22.786,17.375 23.371,17.375
  Top Layer w0.5: v1@32.983,14.762 R100.1@33.98,15.759 ; C41.2@38.26,30.59 38.3,30.631 38.3,30.731 38.4,30.831 38.5,30.831 38.569,30.9 v2(41.3,30.9) 41.75,30.9 41.786,30.936 U8.9@41.786,34.85 ; v2@41.358,30.842 R12.2@42.336,30.842 42.55,30.628 42.55,29.828 C14.2@42.736,29.642 ; v1(45.2,34.15) 46.1,34.15 R13.2@46.15,34.1
  Top Layer w0.8: R02.2@17.654,7.546 R03.2@19.254,7.546 R04.2@20.854,7.546 v3(22.45,7.546) ; v3(19.994,21.25) v3@20.121,21.25 ; 22.5,22.7 21.05,21.25 v3@20.121,21.25 ; 23.131,17.72 22.986,17.864 22.986,18.39 22.676,18.7 20.361,21.015 20.356,21.015 v3@20.121,21.25 ; 23.371,17.375 ccw(c23.371,17.427) 23.423,17.427 C02.2@24.767,16.083 ; R18.2@31.603,13.646 33.05,13.597 ; v1(32.983,14.62) 32.983,13.663 33.05,13.597 ; R19.1@34.4,13.55 33.05,13.597 ; 40.448,11.409 40.448,10.016 40.899,10.016 41.165,9.75 43.35,9.75 v3@43.85,9.75 ; C10.2@47.673,9.8 47.673,9.75 47.773,9.65 C10.2@47.823,9.65
  other v2: 41.842,31.558 41.8,34.315
  other v3: 43.35,9.55 45.35,9.55 41.4,11.15 43.3,11.25 45.35,11.25
3V3RF_L01CPU: C08.1 C09.2 L01.1 U3.2 U3.4 | length 11.6
  Top Layer w0.4: L01.1@49.55,10.9 49.55,11 50,11.45 L01.1@50,11.75
  Top Layer w1.5: L01.1@50,11.75 50.81,12.56 U3.2@53.932,12.56
  Top Layer w2: U3.2@53.932,12.56 U3.4@60.231,12.56
5V: C07.1 C38.2 C39.2 C45.1 C46.1 C47.2 GPS1.2 JUSB.1 L3.2 R20.1 T2HF.2 U2.5 U3.3 U7.1 | length 168.8
  Top Layer w0.22: 63.115,24.29 63.625,24.8 U2.5@63.725,24.8 ; JUSB.1@65.708,23.828 66.258,23.828 JUSB.1@66.348,23.738
  Top Layer w0.5: U7.1@36.323,34.833 36.361,34.796 36.361,34.34 36.762,33.939 v1(36.762,33.858)
  Top Layer w0.6: v1(36.762,33.858) 36.762,33.804 36.8,33.766 36.8,32.85 C39.2@36.848,32.802 ; T2HF.2@45.704,62.207 46.296,62.8 v2(46.386,62.8) v2(47.45,62.8) v2(48.282,62.8) v2@48.345,62.8
  Top Layer w0.7: v1@62.875,24.67 v1(62.955,24.75) ; JUSB.1@66.348,23.738 66.348,23.463 66.483,23.328 66.483,22.478 66.418,22.414 v3(66.418,20.974)
  Top Layer w1: v3@23.91,40.383 v3(24.462,40.383) v3@25.06,40.383 ; R20.1@25.06,39.118 v3@25.06,40.383 ; GPS1.2@25.09,3.334 GPS1.2@25.09,3.73 ; C38.2@26.2,39.118 v3@26.2,40.383 ; v3(26.586,40.49) v3@26.586,40.383 ; v3(29.95,40.383) v3(28.302,40.383) v3@26.586,40.383 ; C07.1@52.5,8.1 52.5,8.925 53.429,9.854 53.429,9.999 U3.3@53.683,9.999 ; U3.3@53.683,10.498 v1(53.932,10.249) ; v3@25.06,40.383 v3@26.2,40.383 ; v3@26.2,40.383 v3@26.586,40.383
  Bottom Layer w0.22: GPS1.2@25.09,3.66 GPS1.2@25.09,3.73 ; v3@66.354,21.038 v3(66.418,20.974)
  Bottom Layer w1: GPS1.2@25.09,3.66 25.09,3.618 25.494,3.214 25.536,3.214 27.55,1.2 44.884,1.2 v1(53.932,10.249) ; v3(26.586,40.49) ccw(c26.845,40.749) v3@26.845,40.383 ; 42.16,36.29 42.275,36.174
  Bottom Layer w2: v3(24.462,40.383) v3@26.586,40.383 ; v3@26.845,40.383 v3(28.302,40.383) v3(29.95,40.383) 32.65,40.383 35.999,37.034 ccw(c37.795,38.83) 37.795,36.29 39.193,36.29 ; v1(36.762,33.858) 38.494,35.591 39.193,36.29 ; 42.16,36.29 39.193,36.29 ; 42.275,36.174 51.162,36.174 51.386,35.95 52.764,35.95 54.108,35.95 56.236,35.95 57.55,35.95 v1(57.955,35.95) 60.15,35.95 ; v2@46.313,62.8 v2(46.386,62.8) v2(47.45,62.8) v2(48.282,62.8) 54.65,62.8 60.15,57.3 60.15,35.95 ; v1(53.932,10.249) 53.932,13.332 62.955,22.355 62.955,33.145 60.15,35.95 ; 61.811,21.038 v3@66.354,21.038
  other v1: 54.459,35.742 52.764,36.293 56.236,36.352
BAND_SEL: U1.12 U7.2 | length 22.2
  Top Layer w0.22: U1.12@24.111,24.2 25.107,24.2 25.236,24.329 25.236,25.534 26.35,26.648 27.962,28.26 34.319,28.26 37.66,31.601 37.66,34.895 37.071,35.484 U7.2@36.323,35.484
CE_U1: R10.8 U4.4 | length 7.8
  Top Layer w0.2: U4.4@49.525,26.75 50.201,26.75 50.836,26.115 50.836,24.392 51.336,23.892 53.408,23.892 54.4,22.9 R10.8@54.4,22.55
CLK_LED: U1.38 | length 0.7
  Top Layer w0.22: U1.38@17.786,16.628 U1.38@17.786,17.375
CPU_LOCK_LED: LOCK.2 U1.40 | length 3.9
  Top Layer w0.22: U1.40@18.786,17.375 18.786,16.628 18.876,16.538 18.876,16.434 19.254,16.056 LOCK.2@19.254,13.65
CPU_MIX_LED: MIX.2 U1.41 | length 4.4
  Top Layer w0.22: U1.41@19.286,17.375 19.286,16.628 19.376,16.538 19.376,16.457 19.624,16.209 19.624,16.185 19.7,16.109 19.7,15.197 20.8,14.097 MIX.2@20.8,13.6
CPU_OSC_IN: C04.2 U1.5 X1.3 | length 8.9
  Top Layer w0.2: X1.3@30,19.4 30.25,19.15 C04.2@30.25,17.211
  Top Layer w0.22: U1.5@24.111,20.7 29.261,20.7 30.045,19.916 X1.3@30.045,19.605
CPU_OSC_OUT: C05.2 U1.6 X1.1 | length 6.8
  Top Layer w0.2: U1.6@24.111,21.2 24.13,21.181 26.431,21.181 X1.1@28.2,22.95 ; X1.1@27.8,23.1 27.98,23.28 C05.2@27.98,24.95
CPU_RX: GPS1.8 U1.22 | length 28.8
  Top Layer w0.3: 18.286,24.083 U1.22@18.286,25.525
  Top Layer w0.4: 18.286,24.083 v1(19.45,22.919)
  Bottom Layer w0.4: v1(19.45,22.919) 20.134,22.235 20.402,22.235 20.979,21.658 28.933,13.704 28.933,12.429 33.822,7.54 33.822,5.555 33.368,5.101 33.368,4.946 32.71,4.288 GPS1.8@32.71,3.73
CPU_SCL: R18.1 U1.42 U5.2 | length 20
  Top Layer w0.22: U1.42@19.876,16.554 19.876,16.48 19.994,16.362 19.994,16.339 20.07,16.263 20.07,15.35 21.261,14.159 21.47,14.159 21.622,14.006 21.622,13.798 24.22,11.2 31.15,11.2 R18.1@31.6,11.65 31.7,11.65 32.24,11.11 32.24,11.01 33.975,9.275 U5.2@35.7,9.275
CPU_SDA: R19.2 U1.43 U5.1 | length 21
  Top Layer w0.22: U1.43@20.286,17.375 20.286,16.628 20.376,16.538 20.376,16.48 20.506,16.35 20.506,15.437 21.415,14.529 21.623,14.529 21.992,14.16 21.992,13.951 24.356,11.587 29.769,11.587 30.742,12.56 32.458,12.56 33.368,11.65 R19.2@34.4,11.65 34.94,11.11 34.94,10.066 35.081,9.925 U5.1@35.7,9.925